# Altium PCB 100861.pcbdoc (part 2 of 2)
Units mm, origin at the board's own origin, x right, y up, seen from the top; angles counter-clockwise.
Board outline 64 x 17.5 mm, 4 copper layers (Top Layer, Ground, Power, Bottom Layer), stack 1.551 mm thick; 99 components, 69 nets, 422 pads, 178 vias.
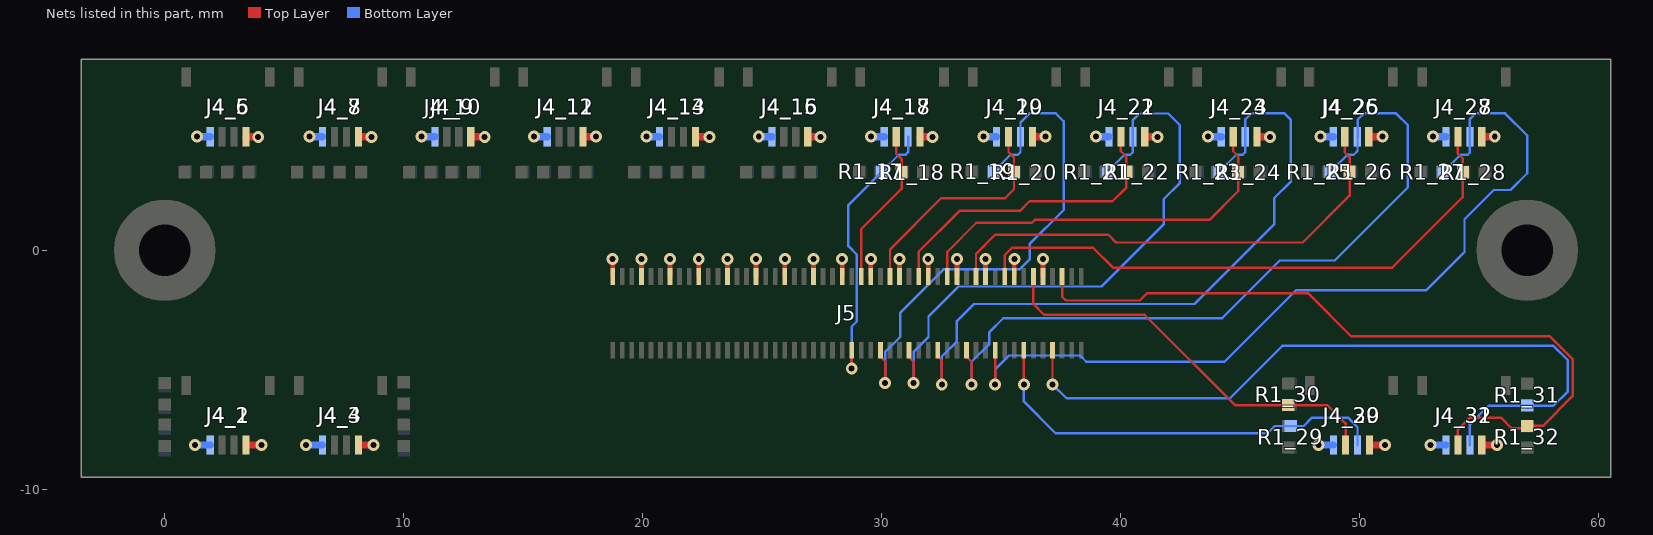
[diagram p4: the nets of this part, all layers, seen from the top]

## Via types
v1: diameter 0.5, hole 0.25, Top Layer to Bottom Layer, tented both sides, 178 vias

## Nets (pads, with @x,y where several pads share a name; then routed paths per layer and width w, separated by ;. In a path a pad name is that pad's centre, name@x,y a point inside that pad or via, vN(x,y) a via of type N, cw(c..) or ccw(c..) an arc to the next point about the centre after c; other vN are vias at no path point) (continued)
SENSOR_B17: J4_17.2 J5.51 R1_17.2 | length 11.9
  Top Layer w0.1: v1(28.74,-4.94) J5.51@28.74,-4.18
  Bottom Layer w0.1: v1(28.74,-4.94) 28.74,-3.185 28.95,-2.975 28.95,-0.175 28.6,0.175 28.6,1.894 R1_17.2@30,3.294 30.706,4 30.993,4 31.1,4.107 J4_17.2@31.1,4.75
SENSOR_B18: J4_18.2 J5.54 R1_18.2 | length 6.6
  Top Layer w0.1: J5.54@29.14,-1.1 29.14,0.885 30.829,2.574 R1_18.2@30.829,3.265 30.829,3.815 30.6,4.043 J4_18.2@30.6,4.75
SENSOR_B19: J4_19.2 J5.57 R1_19.2 | length 22.1
  Top Layer w0.1: J5.57@29.94,-4.18 29.94,-4.449 30.14,-4.649 30.14,-5.543 v1(30.136,-5.547)
  Bottom Layer w0.1: v1(30.136,-5.547) 30.136,-4.256 30.775,-3.618 30.775,-2.6 32.575,-0.8 35.764,-0.8 36.183,-0.382 36.183,0.268 37.607,1.692 37.607,5.394 37.273,5.728 36.183,5.728 35.8,5.345 J4_19.2@35.8,4.75 35.8,4.107 35.693,4 35.386,4 R1_19.2@34.7,3.315
SENSOR_B20: J4_20.2 J5.60 R1_20.2 | length 9.7
  Top Layer w0.1: J5.60@30.34,-1.1 30.34,0.04 32.484,2.184 35.16,2.184 35.529,2.552 R1_20.2@35.529,3.265 35.529,3.89 35.3,4.118 J4_20.2@35.3,4.75
SENSOR_B21: J4_21.2 J5.63 R1_21.2 | length 25.4
  Top Layer w0.1: J5.63@31.14,-4.18 31.14,-4.476 31.328,-4.664 v1(31.328,-5.557)
  Bottom Layer w0.1: v1(31.328,-5.557) 31.328,-4.252 31.95,-3.63 31.95,-2.775 33.213,-1.512 39.189,-1.512 41.786,1.085 41.786,2.136 42.469,2.819 42.469,5.232 41.979,5.722 40.772,5.722 40.5,5.45 J4_21.2@40.5,4.75 40.5,4.107 40.393,4 40.156,4 R1_21.2@39.45,3.294
SENSOR_B22: J4_22.2 J5.66 R1_22.2 | length 13.1
  Top Layer w0.1: J5.66@31.54,-1.1 31.54,-0.06 33.25,1.65 35.775,1.65 36.175,2.05 39.644,2.05 40.229,2.635 R1_22.2@40.229,3.29 40.229,3.915 40,4.143 J4_22.2@40,4.75
SENSOR_B23: J4_23.2 J5.69 R1_23.2 | length 28.9
  Top Layer w0.1: J5.69@32.34,-4.18 32.34,-4.442 32.507,-4.609 v1(32.507,-5.608)
  Bottom Layer w0.1: v1(32.507,-5.608) 32.507,-4.443 33.14,-3.81 33.14,-2.96 33.855,-2.245 43.078,-2.245 46.408,1.085 46.408,2.178 47.112,2.882 47.112,5.456 46.84,5.728 45.45,5.728 45.2,5.478 J4_23.2@45.2,4.75 45.2,4.107 45.093,4 44.828,4 R1_23.2@44.122,3.294
SENSOR_B24: J4_24.2 J5.72 R1_24.2 | length 16.6
  Top Layer w0.1: J5.72@32.74,-1.1 32.74,-0.06 33.95,1.15 36.275,1.15 36.4,1.275 43.707,1.275 44.904,2.471 R1_24.2@44.904,3.265 44.904,3.94 44.7,4.143 J4_24.2@44.7,4.75
SENSOR_B25: J4_25.2 J5.75 R1_25.2 | length 31.8
  Top Layer w0.1: J5.75@33.54,-4.18 33.54,-4.45 33.754,-4.664 v1(33.754,-5.612)
  Bottom Layer w0.1: v1(33.754,-5.612) 33.754,-4.664 34.498,-3.919 34.498,-3.418 35.076,-2.84 44.234,-2.84 46.649,-0.425 48.948,-0.425 52,2.627 52,5.238 51.51,5.728 50.17,5.728 49.902,5.46 49.902,4.753 J4_25.2@49.9,4.75 49.9,4.157 49.743,4 49.478,4 R1_25.2@48.772,3.294
SENSOR_B26: J4_26.2 J5.78 R1_26.2 | length 20.4
  Top Layer w0.1: J5.78@33.94,-1.1 33.94,-0.15 34.74,0.65 39.475,0.65 39.8,0.325 47.605,0.325 49.57,2.29 R1_26.2@49.57,3.294 49.57,3.889 49.366,4.093 J4_26.2@49.366,4.75
SENSOR_B27: J4_27.2 J5.81 R1_27.2 | length 36
  Top Layer w0.1: v1(34.74,-5.608) J5.81@34.74,-4.18
  Bottom Layer w0.1: v1(34.74,-5.608) 34.74,-4.98 35.321,-4.399 38.285,-4.399 38.55,-4.664 44.336,-4.664 47.337,-1.663 52.779,-1.663 54.375,-0.067 54.375,1.3 55.6,2.525 56.3,2.525 57,3.225 57,4.801 56.073,5.728 54.838,5.728 54.6,5.49 J4_27.2@54.6,4.75 54.6,4.086 54.513,4 54.21,4 R1_27.2@53.504,3.294
SENSOR_B28: J4_28.2 J5.84 R1_28.2 | length 24.4
  Top Layer w0.1: J5.84@35.14,-1.1 35.14,-0.2 35.45,0.11 38.84,0.11 39.675,-0.725 51.355,-0.725 54.304,2.224 R1_28.2@54.304,3.269 54.304,3.839 54.1,4.043 J4_28.2@54.1,4.75
SENSOR_B29: J4_29.2 J5.87 R1_29.2 | length 17.8
  Top Layer w0.1: v1(35.94,-5.608) J5.87@35.94,-4.18
  Bottom Layer w0.1: v1(35.94,-5.608) 35.94,-6.325 37.273,-7.658 46.126,-7.658 46.434,-7.35 R1_29.2@47.105,-7.35 47.65,-7.35 48,-7 49.5,-7 49.9,-7.4 J4_29.2@49.9,-8.15
SENSOR_B30: J4_30.2 J5.90 R1_30.2 | length 17.3
  Top Layer w0.1: J5.90@36.34,-1.1 36.34,-2.245 36.795,-2.7 41,-2.7 44.778,-6.478 R1_30.2@47,-6.478 R1_30.2@47.053,-6.478 ; R1_30.2@47,-6.425 R1_30.2@47.053,-6.478 ; J4_30.2@49.4,-8.15 49.4,-7.242 48.636,-6.478 R1_30.2@47.053,-6.478
SENSOR_B31: J4_31.2 J5.93 R1_31.2 | length 31.3
  Top Layer w0.1: v1(37.14,-5.608) J5.93@37.14,-4.18
  Bottom Layer w0.1: v1(37.14,-5.608) 37.724,-6.192 44.558,-6.192 46.75,-4 58.1,-4 58.7,-4.6 58.7,-5.9 58.1,-6.5 R1_31.2@57,-6.5 55.381,-6.5 54.6,-7.282 J4_31.2@54.6,-8.15 ; R1_31.2@57,-6.598 R1_31.2@57.039,-6.598
SENSOR_B32: J4_32.2 J5.96 R1_32.2 | length 31.5
  Top Layer w0.1: J5.96@37.54,-1.1 37.54,-1.94 37.7,-2.1 40.79,-2.1 41.1,-1.79 47.828,-1.79 49.638,-3.6 57.952,-3.6 58.9,-4.548 58.9,-6.1 57.653,-7.347 R1_32.2@57,-7.347 56.898,-7.449 56.35,-7.449 55.901,-7 54.6,-7 54.1,-7.5 J4_32.2@54.1,-8.15
SENSOR_VCC1: J4_1.4 J4_2.4 J4_3.4 J4_4.4 J4_5.4 J4_6.4 J4_7.4 J4_8.4 J5.2 J5.8 J5.14 J5.20 | length 7.7
  Top Layer w0.2: J5.2@18.74,-1.1 v1(18.74,-0.368) ; J5.8@19.94,-1.1 v1(19.94,-0.368) ; J5.14@21.14,-1.1 v1(21.14,-0.368) ; J5.20@22.34,-1.1 v1(22.34,-0.368)
  Top Layer w0.3: J4_2.4@3.4,-8.15 v1(4.041,-8.15) ; J4_6.4@3.4,4.75 v1(3.91,4.75) ; J4_4.4@8.1,-8.15 v1(8.741,-8.15) ; J4_8.4@8.1,4.75 v1(8.64,4.75)
  Bottom Layer w0.3: v1(1.259,-8.15) J4_1.4@1.9,-8.15 ; v1(1.35,4.76) 1.36,4.75 J4_5.4@1.9,4.75 ; v1(5.9,-8.15) J4_3.4@6.6,-8.15 ; v1@6.064,4.75 J4_7.4@6.6,4.75
  other v1: 6.05,4.76
SENSOR_VCC2: J4_9.4 J4_10.4 J4_11.4 J4_12.4 J4_13.4 J4_14.4 J4_15.4 J4_16.4 J5.26 J5.32 J5.38 J5.44 | length 7.3
  Top Layer w0.2: J5.26@23.54,-1.1 v1(23.54,-0.368) ; J5.32@24.74,-1.1 v1(24.74,-0.368) ; J5.38@25.94,-1.1 v1(25.94,-0.368) ; J5.44@27.14,-1.1 v1(27.14,-0.368)
  Top Layer w0.3: J4_10.4@12.8,4.75 v1(13.386,4.75) ; J4_12.4@17.5,4.75 18.03,4.75 v1(18.04,4.76) ; J4_14.4@22.2,4.75 v1(22.786,4.75) ; J4_16.4@26.897,4.75 v1(27.44,4.75)
  Bottom Layer w0.3: v1@10.764,4.75 J4_9.4@11.3,4.75 ; v1@15.464,4.75 J4_11.4@16,4.75 ; v1@20.164,4.75 J4_13.4@20.7,4.75 ; v1@24.864,4.75 J4_15.4@25.4,4.75
  other v1: 10.75,4.76 15.45,4.76 20.15,4.76 24.85,4.76
SENSOR_VCC3: J4_17.4 J4_18.4 J4_19.4 J4_20.4 J4_21.4 J4_22.4 J4_23.4 J4_24.4 J5.50 J5.56 J5.62 J5.68 | length 7.2
  Top Layer w0.2: J5.50@28.34,-1.1 v1(28.34,-0.368) ; J5.56@29.54,-1.1 v1(29.54,-0.368) ; J5.62@30.74,-1.1 v1(30.74,-0.368) ; J5.68@31.94,-1.1 v1(31.94,-0.368)
  Top Layer w0.3: J4_18.4@31.6,4.75 v1(32.122,4.75) ; J4_20.4@36.3,4.75 36.83,4.75 v1(36.84,4.76) ; J4_22.4@41,4.75 v1(41.54,4.75) ; J4_24.4@45.7,4.75 v1(46.24,4.75)
  Bottom Layer w0.3: v1@29.564,4.75 J4_17.4@30.1,4.75 ; v1@34.264,4.75 J4_19.4@34.8,4.75 ; v1@38.964,4.75 J4_21.4@39.5,4.75 ; v1@43.664,4.75 J4_23.4@44.2,4.75
  other v1: 29.55,4.76 34.25,4.76 38.95,4.76 43.65,4.76
SENSOR_VCC4: J4_25.4 J4_26.4 J4_27.4 J4_28.4 J4_29.4 J4_30.4 J4_31.4 J4_32.4 J5.74 J5.80 J5.86 J5.92 | length 7.7
  Top Layer w0.2: J5.74@33.14,-1.1 v1(33.14,-0.368) ; J5.80@34.34,-1.1 v1(34.34,-0.368) ; J5.86@35.54,-1.1 v1(35.54,-0.368) ; J5.92@36.74,-1.1 v1(36.74,-0.368)
  Top Layer w0.3: J4_26.4@50.366,4.75 50.93,4.75 v1(50.94,4.76) ; J4_30.4@50.4,-8.15 v1(51.041,-8.15) ; J4_32.4@55.1,-8.15 v1(55.741,-8.15) ; J4_28.4@55.1,4.75 55.63,4.75 v1(55.64,4.76)
  Bottom Layer w0.1: v1(53.05,4.76) 53.054,4.76 v1@53.064,4.75
  Bottom Layer w0.3: v1(48.259,-8.15) J4_29.4@48.9,-8.15 ; v1@48.364,4.75 J4_25.4@48.9,4.75 ; v1(52.959,-8.15) J4_31.4@53.6,-8.15 ; v1@53.064,4.75 J4_27.4@53.6,4.75
  other v1: 48.35,4.76

## Polygon pours and split planes (outlines as drawn)
no net on FAB_DWG (solid): -233.325,-25.12 ccw(c-233.825,-25.12) -233.825,-24.62 ccw(c-233.825,-25.12) -234.325,-25.12 ccw(c-233.825,-25.12) -233.825,-25.62 ccw(c-233.825,-25.12) -233.325,-25.12
no net on FAB_DWG (solid): -235.325,-25.12 ccw(c-235.825,-25.12) -235.825,-24.62 ccw(c-235.825,-25.12) -236.325,-25.12 ccw(c-235.825,-25.12) -235.825,-25.62 ccw(c-235.825,-25.12) -235.325,-25.12
no net on FAB_DWG (solid): -233.325,-75.12 ccw(c-233.825,-75.12) -233.825,-74.62 ccw(c-233.825,-75.12) -234.325,-75.12 ccw(c-233.825,-75.12) -233.825,-75.62 ccw(c-233.825,-75.12) -233.325,-75.12
no net on FAB_DWG (solid): -235.325,-75.12 ccw(c-235.825,-75.12) -235.825,-74.62 ccw(c-235.825,-75.12) -236.325,-75.12 ccw(c-235.825,-75.12) -235.825,-75.62 ccw(c-235.825,-75.12) -235.325,-75.12
no net on FAB_DWG (solid): -239.325,-25.12 ccw(c-239.825,-25.12) -239.825,-24.62 ccw(c-239.825,-25.12) -240.325,-25.12 ccw(c-239.825,-25.12) -239.825,-25.62 ccw(c-239.825,-25.12) -239.325,-25.12
no net on FAB_DWG (solid): -241.325,-25.12 ccw(c-241.825,-25.12) -241.825,-24.62 ccw(c-241.825,-25.12) -242.325,-25.12 ccw(c-241.825,-25.12) -241.825,-25.62 ccw(c-241.825,-25.12) -241.325,-25.12
no net on FAB_DWG (solid): -243.325,-25.12 ccw(c-243.825,-25.12) -243.825,-24.62 ccw(c-243.825,-25.12) -244.325,-25.12 ccw(c-243.825,-25.12) -243.825,-25.62 ccw(c-243.825,-25.12) -243.325,-25.12
no net on FAB_DWG (solid): -237.325,-25.12 ccw(c-237.825,-25.12) -237.825,-24.62 ccw(c-237.825,-25.12) -238.325,-25.12 ccw(c-237.825,-25.12) -237.825,-25.62 ccw(c-237.825,-25.12) -237.325,-25.12
no net on FAB_DWG (solid): -239.325,-75.12 ccw(c-239.825,-75.12) -239.825,-74.62 ccw(c-239.825,-75.12) -240.325,-75.12 ccw(c-239.825,-75.12) -239.825,-75.62 ccw(c-239.825,-75.12) -239.325,-75.12
no net on FAB_DWG (solid): -241.325,-75.12 ccw(c-241.825,-75.12) -241.825,-74.62 ccw(c-241.825,-75.12) -242.325,-75.12 ccw(c-241.825,-75.12) -241.825,-75.62 ccw(c-241.825,-75.12) -241.325,-75.12
no net on FAB_DWG (solid): -243.325,-75.12 ccw(c-243.825,-75.12) -243.825,-74.62 ccw(c-243.825,-75.12) -244.325,-75.12 ccw(c-243.825,-75.12) -243.825,-75.62 ccw(c-243.825,-75.12) -243.325,-75.12
no net on FAB_DWG (solid): -237.325,-75.12 ccw(c-237.825,-75.12) -237.825,-74.62 ccw(c-237.825,-75.12) -238.325,-75.12 ccw(c-237.825,-75.12) -237.825,-75.62 ccw(c-237.825,-75.12) -237.325,-75.12
no net on FAB_DWG (solid): -247.325,-25.12 ccw(c-247.825,-25.12) -247.825,-24.62 ccw(c-247.825,-25.12) -248.325,-25.12 ccw(c-247.825,-25.12) -247.825,-25.62 ccw(c-247.825,-25.12) -247.325,-25.12
no net on FAB_DWG (solid): -251.325,-25.12 ccw(c-251.825,-25.12) -251.825,-24.62 ccw(c-251.825,-25.12) -252.325,-25.12 ccw(c-251.825,-25.12) -251.825,-25.62 ccw(c-251.825,-25.12) -251.325,-25.12
no net on FAB_DWG (solid): -249.325,-25.12 ccw(c-249.825,-25.12) -249.825,-24.62 ccw(c-249.825,-25.12) -250.325,-25.12 ccw(c-249.825,-25.12) -249.825,-25.62 ccw(c-249.825,-25.12) -249.325,-25.12
no net on FAB_DWG (solid): -245.325,-25.12 ccw(c-245.825,-25.12) -245.825,-24.62 ccw(c-245.825,-25.12) -246.325,-25.12 ccw(c-245.825,-25.12) -245.825,-25.62 ccw(c-245.825,-25.12) -245.325,-25.12
no net on FAB_DWG (solid): -247.325,-75.12 ccw(c-247.825,-75.12) -247.825,-74.62 ccw(c-247.825,-75.12) -248.325,-75.12 ccw(c-247.825,-75.12) -247.825,-75.62 ccw(c-247.825,-75.12) -247.325,-75.12
no net on FAB_DWG (solid): -251.325,-75.12 ccw(c-251.825,-75.12) -251.825,-74.62 ccw(c-251.825,-75.12) -252.325,-75.12 ccw(c-251.825,-75.12) -251.825,-75.62 ccw(c-251.825,-75.12) -251.325,-75.12
no net on FAB_DWG (solid): -249.325,-75.12 ccw(c-249.825,-75.12) -249.825,-74.62 ccw(c-249.825,-75.12) -250.325,-75.12 ccw(c-249.825,-75.12) -249.825,-75.62 ccw(c-249.825,-75.12) -249.325,-75.12
no net on FAB_DWG (solid): -245.325,-75.12 ccw(c-245.825,-75.12) -245.825,-74.62 ccw(c-245.825,-75.12) -246.325,-75.12 ccw(c-245.825,-75.12) -245.825,-75.62 ccw(c-245.825,-75.12) -245.325,-75.12
no net on FAB_DWG (solid): -255.325,-25.12 ccw(c-255.825,-25.12) -255.825,-24.62 ccw(c-255.825,-25.12) -256.325,-25.12 ccw(c-255.825,-25.12) -255.825,-25.62 ccw(c-255.825,-25.12) -255.325,-25.12
no net on FAB_DWG (solid): -259.325,-25.12 ccw(c-259.825,-25.12) -259.825,-24.62 ccw(c-259.825,-25.12) -260.325,-25.12 ccw(c-259.825,-25.12) -259.825,-25.62 ccw(c-259.825,-25.12) -259.325,-25.12
no net on FAB_DWG (solid): -257.325,-25.12 ccw(c-257.825,-25.12) -257.825,-24.62 ccw(c-257.825,-25.12) -258.325,-25.12 ccw(c-257.825,-25.12) -257.825,-25.62 ccw(c-257.825,-25.12) -257.325,-25.12
no net on FAB_DWG (solid): -253.325,-25.12 ccw(c-253.825,-25.12) -253.825,-24.62 ccw(c-253.825,-25.12) -254.325,-25.12 ccw(c-253.825,-25.12) -253.825,-25.62 ccw(c-253.825,-25.12) -253.325,-25.12
no net on FAB_DWG (solid): -255.325,-75.12 ccw(c-255.825,-75.12) -255.825,-74.62 ccw(c-255.825,-75.12) -256.325,-75.12 ccw(c-255.825,-75.12) -255.825,-75.62 ccw(c-255.825,-75.12) -255.325,-75.12
no net on FAB_DWG (solid): -259.325,-75.12 ccw(c-259.825,-75.12) -259.825,-74.62 ccw(c-259.825,-75.12) -260.325,-75.12 ccw(c-259.825,-75.12) -259.825,-75.62 ccw(c-259.825,-75.12) -259.325,-75.12
no net on FAB_DWG (solid): -257.325,-75.12 ccw(c-257.825,-75.12) -257.825,-74.62 ccw(c-257.825,-75.12) -258.325,-75.12 ccw(c-257.825,-75.12) -257.825,-75.62 ccw(c-257.825,-75.12) -257.325,-75.12
no net on FAB_DWG (solid): -253.325,-75.12 ccw(c-253.825,-75.12) -253.825,-74.62 ccw(c-253.825,-75.12) -254.325,-75.12 ccw(c-253.825,-75.12) -253.825,-75.62 ccw(c-253.825,-75.12) -253.325,-75.12
no net on FAB_DWG (solid): -261.325,-25.12 ccw(c-261.825,-25.12) -261.825,-24.62 ccw(c-261.825,-25.12) -262.325,-25.12 ccw(c-261.825,-25.12) -261.825,-25.62 ccw(c-261.825,-25.12) -261.325,-25.12
no net on FAB_DWG (solid): -263.825,-33.12 -263.325,-31.62 -232.325,-31.62 -231.825,-33.12 -263.825,-33.12
no net on FAB_DWG (solid): -263.925,-46.62 -263.425,-45.12 -232.225,-45.12 -231.725,-46.62 -263.925,-46.62
no net on FAB_DWG (solid): -231.725,-53.62 -232.225,-55.12 -263.425,-55.12 -263.925,-53.62 -231.725,-53.62
no net on FAB_DWG (solid): -231.825,-67.12 -232.325,-68.62 -263.325,-68.62 -263.825,-67.12 -231.825,-67.12
no net on FAB_DWG (solid): -261.325,-75.12 ccw(c-261.825,-75.12) -261.825,-74.62 ccw(c-261.825,-75.12) -262.325,-75.12 ccw(c-261.825,-75.12) -261.825,-75.62 ccw(c-261.825,-75.12) -261.325,-75.12
no net on FAB_DWG (solid): -318.825,-24.62 -317.825,-28.62 -318.825,-28.12 -319.825,-28.62 -318.825,-24.62
no net on FAB_DWG (solid): -318.825,-75.62 -319.825,-71.62 -318.825,-72.12 -317.825,-71.62 -318.825,-75.62
no net on FAB_DWG (solid): 1029 vertices, not listed, extent 280.89,-133.333 421.936,-119.759
no net on FAB_DWG (solid): 89 vertices, not listed, extent 321.11,-123.525 327.529,-119.761
no net on FAB_DWG (solid): 74 vertices, not listed, extent 332.78,-126.496 340.172,-119.761
no net on FAB_DWG (solid): 83 vertices, not listed, extent 346.562,-125.262 351.467,-120.673
no net on FAB_DWG (solid): 82 vertices, not listed, extent 358.174,-123.906 364.519,-120.678
no net on ASY_DWG (solid): 1029 vertices, not listed, extent 280.89,-133.333 421.936,-119.759
no net on ASY_DWG (solid): 89 vertices, not listed, extent 321.11,-123.525 327.529,-119.761
no net on ASY_DWG (solid): 74 vertices, not listed, extent 332.78,-126.496 340.172,-119.761
no net on ASY_DWG (solid): 83 vertices, not listed, extent 346.562,-125.262 351.467,-120.673
no net on ASY_DWG (solid): 82 vertices, not listed, extent 358.174,-123.906 364.519,-120.678
no net on ASY_DWG_R (solid): 1029 vertices, not listed, extent -349.064,-133.333 -208.018,-119.759
no net on ASY_DWG_R (solid): 89 vertices, not listed, extent -254.657,-123.525 -248.237,-119.761
no net on ASY_DWG_R (solid): 74 vertices, not listed, extent -267.3,-126.496 -259.907,-119.761
no net on ASY_DWG_R (solid): 83 vertices, not listed, extent -278.594,-125.262 -273.689,-120.673
no net on ASY_DWG_R (solid): 82 vertices, not listed, extent -291.647,-123.906 -285.302,-120.678
no net on TITLEBLOCK (solid): 331 vertices, not listed, extent -27.089,-106.333 31.616,-99.713
no net on TITLEBLOCK (solid): -5.152,-99.933 -2.614,-102.251 -2.614,-99.933 -5.152,-99.933
no net on TITLEBLOCK (solid): -10.339,-99.933 -9.216,-101.142 -8.137,-99.933 -10.339,-99.933
no net on TITLEBLOCK (solid): 0.146,-101.833 1.136,-100.033 2.036,-101.833 0.146,-101.833
no net on TITLEBLOCK (solid): 26 vertices, not listed, extent 4.986,-101.233 7.686,-99.933
SENSOR_VCC3 on Power "SENSOR_VCC3_L03_P224" (solid, pour order 224): 27.593,-9.948 27.593,10.352 63.548,10.352 63.548,-9.948 50.759,-9.948
SENSOR_VCC2 on Power "SENSOR_VCC2_L03_P222" (solid, pour order 222): 27.805,-10.963 27.805,9.337 -5.195,9.337 -5.195,-10.963 7.594,-10.963
SENSOR_VCC4 on Power "SENSOR_VCC4_L03_P220" (solid, pour order 220): 32.74,-2.04 32.74,1.865 47.039,1.865 47.039,8.96 61.44,8.96 61.44,-9.5 47.343,-9.5 47.343,-3.851 45.532,-2.04
SENSOR_VCC1 on Power "SENSOR_VCC1_L03_P216" (solid, pour order 216): 22.74,-2.04 22.75,-2.03 22.75,1.865 9.31,1.865 9.31,8.96 -3.5,8.96 -3.5,-9.5 10,-9.5 10,-3.557 11.517,-2.04
GND on Ground "GND_L02_P226" (solid, pour order 226): -7.66,10.76 -7.86,10.56 -7.86,-14 62,-14 62,10.96 -6.06,11.06 -6.16,10.96

## Other copper
Top Layer:
  text ".Layer_Name" at 0.372,-125.304 h3.5
Ground:
  text ".Layer_Name" at 3.44,-125.54 h3.5
Power:
  text ".Layer_Name" at 5.24,-125.54 h3.5
Bottom Layer:
  text "601-'.Board_Number'-R'.PCB_Revision'" at 33.507,-8.125 h1
  text ".Layer_Name" at -5.043,-124.971 h3.5

## Silkscreen, mask and mechanical layers (free items; w line width, h text height)
Top Overlay:
  region: 50.32,-0.1 54.32,-0.1 54.32,-4.1 50.32,-4.1
  lines w0.15: 15.039,-8.74 15.039,-2.24 ; 15.039,-2.115 cw(c17.039,-2.115) 17.039,-0.115 39.625,-0.115 cw(c39.625,-1.115) 40.332,-0.408 41.747,-1.822 cw(c41.039,-2.529) 42.039,-2.529 ; 42.04,-8.74 42.04,-2.54
  text "#21" at 38.9,1.2 h1.25
  text "#5" at 2.4,1.1 h1.25
  text "#7" at 6.1,1.1 h1.25
  text "#9" at 10.8,1.1 h1.25
  text "#11" at 15.214,1.1 h1.25
  text "#13" at 19.8,1.1 h1.25
  text "#15" at 24.5,1.1 h1.25
  text "#17" at 29.3,1.1 h1.25
  text "#19" at 33.55,1.1 h1.25
  text "#23" at 43.576,1.1 h1.25
  text "#25" at 47.6,1.1 h1.25
  text "#27" at 51.8,1.1 h1.25
  text "'.Board_Name'" at 2.8,-0.4 h1
  text "REV" at 47.353,-2.04 h0.9
  text "601-'.Board_Number'" at 4.1,-2.3 h1
  text "#29" at 46.1,-4.7 h1.25
  text "#31" at 55.4,-4.7 h1.25
  text "#1" at 1.9,-5 h1.25
  text "#3" at 6.486,-5 h1.25
  text ".Layer_Name" at -1.2,-125 h3.5
Bottom Overlay:
  lines w0.1: 20.24,-6.5 37.24,-6.5 37.24,-0.5 20.24,-0.5 20.24,-6.5
  text "#4" at 4.7,1.1 h1.25
  text "#6" at 8.2,1.1 h1.25
  text "#8" at 13,1.1 h1.25
  text "#10" at 17.9,1.1 h1.25
  text "#12" at 22.6,1.1 h1.25
  text "#14" at 27.3,1.1 h1.25
  text "#16" at 32,1.1 h1.25
  text "#18" at 36.85,1.1 h1.25
  text "#20" at 41.55,1.1 h1.25
  text "#22" at 46.486,1.1 h1.25
  text "#26" at 54.7,1.1 h1.25
  text "#24" at 50.6,1 h1.25
  text "#0" at 3.578,-4.6 h1.25
  text "#2" at 8.4,-4.6 h1.25
  text "#28" at 51,-4.6 h1.25
  text "#30" at 56.2,-4.6 h1.25
  text ".Layer_Name" at -4.96,-125.64 h3.5
Top Paste:
  text ".Layer_Name" at -0.703,-124.971 h3.5
Bottom Paste:
  text ".Layer_Name" at -5.193,-125.554 h3.5
Top Solder:
  text ".Layer_Name" at -1.377,-124.971 h3.5
Bottom Solder:
  text ".Layer_Name" at -5.868,-125.554 h3.5
Drill Guide:
  text ".Layer_Name" at -0.153,-125.638 h3.5
Outline:
  lines w0.013: -3.5,-9.5 -3.5,8 60.5,8 60.5,-9.5 4,-9.5 -3.5,-9.5
FAB_DWG:
  drawing of 241 lines, arcs and shapes, not listed
  text "1" at 364.772,324.655 h7.62
  text "6" at -186.56,324.477 h7.62
  text "5" at -75.968,324.401 h7.62
  text "7" at -296.491,324.35 h7.62
  text "4" at 33.633,324.249 h7.62
  text "3" at 144.402,324.249 h7.62
  text "2" at 254.435,324.249 h7.62
  text "REVISIONS" at 318.792,315.667 h2.54
  text "NOTES: UNLESS OTHERWISE SPECIFIED" at -337.668,309.205 h2.03
  text "REV" at 236.5,308.667 h2.03
  text "DESCRIPTION" at 291.004,308.667 h2.03
  text "DATE" at 382.688,308.667 h2.03
  text "APRVD" at 407.876,308.667 h2.03
  text "1   DIMENSIONS AND VALUES ARE METRIC." at -337.668,301.205 h2.03
  text "01" at 236.904,300.667 h2.54
  text "INITIAL RELEASE" at 247.936,300.667 h2.54
  text "08/11/2016" at 376.776,300.667 h2.54
  text "2   FABRICATION OF PRINTED CIRCUIT BOARD SHALL BE IN ACCORDANCE WITH" at -337.668,295.205 h2.03
  text "02" at 236.804,293.867 h2.54
  text "ALPHA 2 RELEASE" at 247.836,293.867 h2.54
  text "09/19/2016" at 376.676,293.867 h2.54
  text "IPC-6011 AND IPC-6012, CLASS 2, AND THE DESIGN INTENT OF IPC-2221 AND" at -337.668,291.205 h2.03
  text "IPC-2222,CLASS 2, AND SHALL MEET THE ACCEPTABILITY REQUIREMENTS OF" at -337.668,287.205 h2.03
  text "IPC-A-600. PRODUCE PCB USING GERBER OR ODB++ FILES PROVIDED." at -337.668,283.205 h2.03
  text "3   FABRICATION VENDOR MUST BE UL APPROVED AND BOARD SHALL BE MARKED WITH" at -337.668,277.205 h2.03
  text "A UL REGISTERED LOGO. MATERIAL MUST MEET UL 94V-0 FLAMMABILITY RATING." at -337.668,273.205 h2.03
  text "4   MATERIAL REQUIREMENTS: MANUFACTURER SHALL SELECT MATERIALS TO ACHIEVE A" at -337.668,267.205 h2.03
  text "BALANCED CONSTRUCTION WITH THE OPTION OF MODIFYING DIELECTRIC THICKNESS" at -337.668,263.205 h2.03
  text "TO MEET THE REQUIREMENTS SPECIFIED HEREIN." at -337.668,259.205 h2.03
  text "D" at 426.621,254.983 h7.62
  text "D" at -358.061,254.831 h7.62
  text "5  BASE MATERIALS: GLASS EPOXY FR4 OR EQUIVALENT PER IPC-4101 MEETING RoHS" at -337.668,253.205 h2.03
  text "REQUIREMENTS FOR PCB FABRICATION AND ASSEMBLY, NOT LESS THAN TG150," at -337.668,249.205 h2.03
  text "A  SEE LAYER DETAIL FOR LAYER STACK UP, ESTIMATED DIELECTRIC THICKNESS," at -337.668,245.205 h2.03
  text "AND COPPER WEIGHT." at -337.668,241.205 h2.03
  text "B  MANUFACTURER SHALL SUBMIT A PROPOSED STACK UP FOR SYNAPSE APPROVAL" at -337.668,237.205 h2.03
  text "IF MODIFICATION IS REQUIRED." at -337.668,233.205 h2.03
  text "C  NO MATERIAL SUBSTITUTIONS WILL BE ALLOWED WITHOUT SYNAPSE APPROVAL." at -337.668,229.205 h2.03
  text "6   PROCESSING ALLOWANCE:" at -337.668,223.205 h2.03
  text "A  LAYER REGISTRATION FROM PRIMARY SIDE TO SECONDARY SIDE SHALL NOT" at -337.668,219.205 h2.03
  text "EXCEED 0.13mm TOTAL." at -337.668,215.205 h2.03
  text "B  MAXIMUM BOW AND TWIST SHALL BE .75% PER IPC-TM-650." at -337.668,211.205 h2.03
  text "7   VIAS" at -337.668,205.205 h2.03
  text "A  VIAS WITH A FINISHED HOLE SIZE OF 0.25mm OR SMALLER DO NOT REQUIRE" at -337.668,201.205 h2.03
  text "A MINIMUM HOLE SIZE AND MAY BE PLATED SHUT OR FILLED WITH SOLDER" at -337.668,197.205 h2.03
  text "MASK. MINIMUM SOLDER PLATING MUST BE MAINTAINED." at -337.668,193.205 h2.03
  text "B  ALL LASER VIA IN PADS TO BE COPLANAR IF PRESENT IN DESIGN." at -337.668,189.205 h2.03
  text "8   CONDUCTORS:  COPPER FOIL SHALL BE IN ACCORDANCE WITH IPC-4562/0." at -337.668,183.205 h2.03
  text "A  FINISH. COPPER PLATE THICKNESS ON SURFACE COPPER AND PLATED" at -337.668,179.205 h2.03
  text "THROUGH HOLES TO BE 0.025mm MINIMUM." at -337.668,175.205 h2.03
  text "B  MINIMUM FINISH CONDUCTOR WIDTH IS 0.076mm" at -337.668,171.205 h2.03
  text "C  MINIMUM FINISHED CONDUCTOR SPACING (AIR GAP) INCLUDING PADS, VIAS," at -337.668,167.205 h2.03
  text "SHAPES, ETC. IS 0.076mm." at -337.668,163.205 h2.03
  text "9   FINAL FINISH SHALL BE ELECTROLESS NICKEL / IMMERSION GOLD (ENIG)." at -337.668,157.205 h2.03
  text "FINISH THICKNESS SHALL BE 3 TO 6 um [118 TO 236 MICROINCHES] OF NICKEL" at -337.668,153.205 h2.03
  text "AND 0.04 TO 0.125um [1.5 TO 5 MICROINCHES] OF GOLD." at -337.668,149.205 h2.03
  text "FINISH SHALL BE RoHS COMPLIANT AND MEET REQUIREMENTS OF IPC-4552." at -337.668,145.205 h2.03
  text "10  FILLETING IS NOT PERMITTED WITHOUT PRIOR SYNAPSE APPROVAL." at -337.668,139.205 h2.03
  text "11  SOLDER MASK AND COATING:  APPLY SOLDER MASK TO PRIMARY AND SECONDARY" at -337.668,133.205 h2.03
  text "C" at 426.621,129.532 h7.62
  text "C" at -358.188,129.329 h7.62
  text "SIDES OF PRINTED WIRING BOARD USING SUPPLIED GERBER FILES IN ACCORDANCE" at -337.668,129.205 h2.03
  text "WITH IPC-SM-840, THICKNESS BETWEEN 0.02 - 0.04mm, COLOR GREEN LIQUID" at -337.668,125.205 h2.03
  text "PHOTO-IMAGEABLE, CLASS 2." at -337.668,121.205 h2.03
  text "12  OVERALL BOARD THICKNESS SHALL BE MEASURED OVER FINAL FINISH INCLUDING" at -337.668,115.205 h2.03
  text "SOLDER MASK." at -337.668,111.205 h2.03
  text "13  SILKSCREEN:  APPLY SILKSCREEN (LEGEND) TO PRIMARY AND SECONDARY SIDES" at -337.668,105.205 h2.03
  text "OF PRINTED CIRCUIT BOARD. USE PERMANENT INK, NON-NUTRIENT, NON-" at -337.668,101.205 h2.03
  text "CONDUCTIVE POLYMER, COLOR WHITE, PER IPC-4781, TYPE 2. RELIEVE LEGEND" at -337.668,97.205 h2.03
  text "FROM ALL EXPOSED LANDS AND HOLES AS REQUIRED." at -337.668,93.205 h2.03
  text "14  ANY ALTERATIONS TO THE PROVIDED GERBER ARTWORK FILES MUST BE SUBMITTED" at -337.668,87.205 h2.03
  text "TO SYNAPSE FOR APPROVAL." at -337.668,83.205 h2.03
  text "15  MARK MANUFACTURER NAME, INITIALS, OR LOGO, LOT NUMBER, DATE CODE," at -337.668,77.705 h2.03
  text "UL RECOGNITION MARK AND FLAME RATING IN ETCH OR SILKSCREEN." at -337.668,73.705 h2.03
  text "16  PANELIZATION: COORDINATE WITH SYNAPSE OR THE SYNAPSE SPECIFIED" at -337.668,67.955 h2.03
  text "ASSEMBLY VENDOR FOR PANEL SIZE AND CONFIGURATION. IF BOARDS ARE" at -337.668,63.955 h2.03
  text "NOT TO BE COMPLETELY ROUTED OUT, TRIM PANELIZATION TABS TO LESS" at -337.668,59.955 h2.03
  text "THAN 0.1mm UPON DE-PANELIZATION. AVOID PANELIZATION TABS IN AREAS" at -337.668,55.955 h2.03
  text "INDICATED ON THIS DRAWING." at -337.668,51.955 h2.03
  text "17  BOARD MUST BE ELECTRICALLY TESTED USING SUPPLIED IPC-356 NETLIST." at -337.168,46.955 h2.03
  text "B" at -357.959,3.929 h7.62
  text "B" at 429.698,1.632 h7.62
  text "PRIMARY SIDE" at -257.569,-16.12 h2.03
  text "SILKSCREEN" at -228.325,-21.12 h2.03
  text "SOLDERMASK" at -228.325,-26.62 h2.03
  text "1 OZ CU" at -281.96,-33.54 h2.03
  text "LAYER 1 (SIGNAL)" at -228.325,-33.621 h2.03
  text "DIELECTRIC" at -283.565,-39.12 h2.03
  text "1.5 +/-0.15" at -328.569,-45.62 h2.03
  text "1/2 OZ CU" at -282.06,-46.74 h2.03
  text "LAYER 2 (GROUND)" at -228.325,-47.12 h2.03
  text "FINISHED" at -325.321,-50.62 h2.03
  text "DIELECTRIC" at -283.565,-51.12 h2.03
  text "THICKNESS" at -326.633,-55.62 h2.03
  text "LAYER 3 (POWER)" at -228.325,-55.62 h2.03
  text "1/2 OZ CU" at -282.06,-55.74 h2.03
  text "DIELECTRIC" at -283.565,-63.62 h2.03
  text "1 OZ CU" at -281.96,-68.84 h2.03
  text "LAYER 4 (SIGNAL)" at -228.325,-69.121 h2.03
  text "SOLDERMASK" at -228.325,-76.12 h2.03
  text "SILKSCREEN" at -228.325,-82.121 h2.03
  text "DIMENSIONS ARE FOR REFERENCE ONLY," at 3.536,-84.363 h2.29
  text "SECONDARY SIDE" at -259.193,-86.62 h2.03
  text "USE BOARD OUTLINE FOR DIMENSIONAL DATA." at -2.524,-88.953 h2.29
  text "LAYER DETAIL" at -272.209,-99.616 h5.08
  text "SCALE:NONE" at -257.445,-106.62 h2.03
  text "CAP CONSTRUCTION SHOWN (PREFERRED)" at -275.333,-112.815 h2.03
  text "CORE CONSTRUCTION ACCEPTABLE" at -270.461,-117.62 h2.03
  text "A" at 426.494,-121.826 h7.62
  text "A" at -358.213,-121.953 h7.62
  text "APPROVALS" at 218.628,-125.333 h2.03
  text "DATE" at 261.688,-125.333 h2.03
  text "UNLESS OTHERWISE" at 162.68,-127.333 h2.54
  text "DESIGNER" at 201.936,-131.333 h2.03
  text "SPECIFIED" at 169.792,-132.333 h2.54
  text "DIMENSIONS ARE" at 164.712,-137.333 h2.54
  text "F. PRICE" at 205.936,-137.333 h2.54
  text "09/19/2016" at 255.776,-137.333 h2.54
  text "1511 Sixth Ave. Suite 300, Seattle, WA 98101 206.381.0898" at 293.024,-138.333 h2.54
  text "IN MILLIMETERS" at 164.712,-142.333 h2.54
  text "ENGINEER" at 201.936,-144.333 h2.03
  text "PRINTED CIRCUIT BOARD" at 319.432,-146.833 h3.81
  text "PROPRIETARY" at 114.172,-147.333 h3.81
  text "D. BRUEY /  M. CIUFFO" at 205.936,-150.333 h2.54
  text "TOLERANCES:" at 168.76,-152.333 h2.54
  text "AND" at 126.364,-153.333 h3.81
  text ".Board_Name" at 328.155,-155.012 h5.08
  text "MECH ENG" at 201.936,-157.333 h2.03
  text ".XX" at 167.44,-159.333 h2.29
  text "0.25" at 180.936,-159.333 h2.29
  text "CONFIDENTIAL" at 112.648,-159.833 h3.81
  text "SIZE" at 285.088,-161.333 h1.78
  text "DWG NO" at 295.936,-161.333 h1.78
  text "REV" at 403.8,-161.333 h1.78
  text "N/A" at 205.936,-163.333 h2.54
  text "THE INFORMATION CONTAINED IN" at 114.662,-164.083 h1.52
  text ".XXX" at 165.608,-166.333 h2.29
  text "0.127" at 180.936,-166.333 h2.29
  text "THIS DRAWING IS PROPRIETARY AND" at 112.838,-166.833 h1.52
  text "RESTRICTED. ANY REPRODUCTION" at 114.662,-169.583 h1.52
  text "601-" at 312.991,-171.034 h7.62
  text ".Board_Number" at 341.391,-171.134 h7.62
  text "D" at 284.888,-171.333 h7.62
  text ".PCB_Revision" at 399.332,-171.841 h7.62
  text "IN PART OR WHOLE WITHOUT THE" at 114.662,-172.333 h1.52
  text "ANGLES" at 167.944,-173.333 h2.29
  text "5" at 186.936,-173.333 h2.29
  text "EXPRESS WRITTEN PERMISSION" at 115.628,-175.083 h1.52
  text "OF THE OWNER IS PROHIBITED" at 115.628,-177.833 h1.52
  text "SCALE:NONE" at 285.816,-178.333 h1.78
  text "SHEET 1 OF 1" at 397.392,-178.333 h1.78
  text "1" at 364.976,-190.381 h7.62
  text "6" at -186.484,-190.533 h7.62
  text "5" at -76.045,-190.533 h7.62
  text "4" at 33.404,-190.812 h7.62
  text "3" at 144.224,-190.838 h7.62
  text "2" at 254.663,-190.838 h7.62
  text "7" at -296.593,-191.397 h7.62
ASY_DWG:
  circle w0.38: c190.679,-170.785 r0.829
  lines w0.3: 200.936,-180.333 200.936,-120.333 ; 200.936,-166.333 280.936,-166.333 ; 200.936,-153.333 280.936,-153.333 ; 200.936,-140.333 280.936,-140.333 421.936,-140.333 ; 200.936,-127.333 280.936,-127.333 ; 231.936,291.667 421.936,291.667 ; 232.261,298.759 231.936,298.667 421.936,298.667 ; 232.261,313.759 231.936,313.667 421.936,313.667 ; 245.936,284.667 245.936,313.667 ; 250.936,-180.333 250.936,-120.333 ; 280.936,-180.333 280.936,-120.333 ; 280.936,-174.333 421.936,-174.333 ; 280.936,-158.333 420.936,-158.333 ; 293.936,-174.333 293.936,-158.333 ; 370.936,284.667 370.936,313.667 ; 389.936,-174.333 389.936,-158.333 ; 401.936,284.667 401.936,313.667
  lines w0.38: 175.936,-166.333 177.936,-166.333 ; 175.936,-164.333 177.936,-164.333 ; 175.936,-159.333 177.936,-159.333 ; 175.936,-157.333 177.936,-157.333 ; 176.936,-165.333 176.936,-163.333 ; 176.936,-158.333 176.936,-156.333 ; 181.936,-173.333 183.936,-173.333 ; 181.936,-171.333 183.936,-171.333 ; 182.936,-172.333 182.936,-170.333
  lines w0.508: 201.958,320.871 201.958,333.825 ; 201.958,320.871 201.958,333.825 ; 201.958,320.871 201.958,333.825 ; -368.653,-55.684 -349.349,-55.684 -368.653,-55.684 ; -368.653,-55.227 -349.349,-55.227 -368.653,-55.227 ; -368.653,69.715 -349.349,69.715 -368.653,69.715 ; -368.653,70.173 -349.349,70.173 -368.653,70.173 ; -368.653,195.115 -349.349,195.115 -368.653,195.115 ; -368.653,195.572 -349.349,195.572 -368.653,195.572 ; -239.417,-193.784 -239.417,-180.83 -239.417,-193.784 ; -239.417,320.871 -239.417,333.825 -239.417,320.871 ; -238.96,-193.784 -238.96,-180.83 -238.96,-193.784 ; -238.96,320.871 -238.96,333.825 -238.96,320.871 ; -129.207,-193.784 -129.207,-180.83 -129.207,-193.784 ; -129.207,320.871 -129.207,333.825 -129.207,320.871 ; -128.75,-193.784 -128.75,-180.83 -128.75,-193.784 ; -128.75,320.871 -128.75,333.825 -128.75,320.871 ; -18.971,-193.784 -18.971,-180.83 -18.971,-193.784 ; -18.971,320.871 -18.971,333.825 -18.971,320.871 ; -18.514,-193.784 -18.514,-180.83 -18.514,-193.784 ; -18.514,320.871 -18.514,333.825 -18.514,320.871 ; 91.291,320.871 91.291,333.825 91.291,320.871 ; 91.748,320.871 91.748,333.825 91.748,320.871 ; 201.501,320.871 201.501,333.825 201.501,320.871 ; 311.712,321.125 311.712,333.825 311.712,321.125 ; 311.737,-193.784 311.737,-180.83 311.737,-193.784 ; 312.169,320.871 312.169,333.825 312.169,320.871 ; 312.194,-193.784 312.194,-180.83 312.194,-193.784 ; 422.176,-55.684 441.48,-55.684 422.176,-55.684 ; 422.176,-55.227 441.48,-55.227 422.176,-55.227 ; 422.176,69.741 441.48,69.741 422.176,69.741 ; 422.176,70.198 441.48,70.198 422.176,70.198 ; 422.176,195.166 441.48,195.166 422.176,195.166 ; 422.176,195.623 441.48,195.623 422.176,195.623
  lines w1: -349.064,-180.333 421.936,-180.333 421.936,320.667 -349.064,320.667 -349.064,-180.333
  lines w1.1: 91.936,-193.333 91.936,-180.333 ; 105.936,-180.333 105.936,-140.333 156.936,-140.333 ; 156.936,-180.333 156.936,-140.333 ; 200.936,-193.333 200.936,-180.333 ; 231.936,284.667 231.936,320.667 ; 231.936,305.667 421.936,305.667 ; 280.936,-120.333 156.936,-120.333 156.936,-140.333
  text "1" at 364.772,324.655 h7.62
  text "6" at -186.56,324.477 h7.62
  text "5" at -75.968,324.401 h7.62
  text "7" at -296.491,324.35 h7.62
  text "4" at 33.633,324.249 h7.62
  text "3" at 144.402,324.249 h7.62
  text "2" at 254.435,324.249 h7.62
  text "REVISIONS" at 318.792,315.667 h2.54
  text "REV" at 236.5,308.667 h2.03
  text "DESCRIPTION" at 291.004,308.667 h2.03
  text "DATE" at 382.688,308.667 h2.03
  text "APRVD" at 407.876,308.667 h2.03
  text "NOTES: UNLESS OTHERWISE SPECIFIED" at -336.939,308.567 h2.03
  text "1   RoHS COMPLIANT ASSEMBLY REQUIRED. ASSEMBLE PER IPC-A-610, CLASS 2," at -336.839,302.067 h2.03
  text "01" at 236.904,300.667 h2.54
  text "INITIAL RELEASE" at 247.936,300.667 h2.54
  text "08/11/2016" at 376.776,300.667 h2.54
  text "2   AQUEOUS BASED CLEANING AFTER SOLDER FOR ALL COMPONENTS IS PREFERRED, NO-CLEAN" at -336.745,296.862 h2.03
  text "02" at 236.804,293.867 h2.54
  text "ALPHA 2 RELEASE" at 247.836,293.867 h2.54
  text "09/19/2016" at 376.676,293.867 h2.54
  text "RoHS SOLDER PROCESS IS ACCEPTABLE." at -336.889,292.717 h2.03
  text "3   ITEM IDENTIFICATION: MARK REVISION NUMBER OF THIS DRAWING IN THE SPACE PROVIDED." at -337.064,286.917 h2.03
  text "D" at 426.621,254.983 h7.62
  text "D" at -358.061,254.831 h7.62
  text "C" at 426.621,129.532 h7.62
  text "C" at -358.188,129.329 h7.62
  text "B" at -357.959,3.929 h7.62
  text "B" at 429.698,1.632 h7.62
  text "ASSEMBLY TOP" at 14.62,-80.308 h3.81
  text "A" at 426.494,-121.826 h7.62
  text "A" at -358.213,-121.953 h7.62
  text "APPROVALS" at 218.628,-125.333 h2.03
  text "DATE" at 261.688,-125.333 h2.03
  text "UNLESS OTHERWISE" at 162.68,-127.333 h2.54
  text "DESIGNER" at 201.936,-131.333 h2.03
  text "SPECIFIED" at 169.792,-132.333 h2.54
  text "DIMENSIONS ARE" at 164.712,-137.333 h2.54
  text "F. PRICE" at 205.936,-137.333 h2.54
  text "09/19/2016" at 255.776,-137.333 h2.54
  text "1511 Sixth Ave. Suite 300, Seattle, WA 98101 206.381.0898" at 293.024,-138.333 h2.54
  text "IN MILLIMETERS" at 164.712,-142.333 h2.54
  text "ENGINEER" at 201.936,-144.333 h2.03
  text "PRINTED CIRCUIT BOARD ASSEMBLY" at 305.716,-146.833 h3.81
  text "PROPRIETARY" at 114.172,-147.333 h3.81
  text "D. BRUEY /  M. CIUFFO" at 205.936,-150.333 h2.54
  text "TOLERANCES:" at 168.76,-152.333 h2.54
  text "AND" at 126.364,-153.333 h3.81
  text ".Board_Name" at 328.144,-154.971 h5.08
  text "MECH ENG" at 201.936,-157.333 h2.03
  text ".XX" at 167.44,-159.333 h2.29
  text "0.25" at 180.936,-159.333 h2.29
  text "CONFIDENTIAL" at 112.648,-159.833 h3.81
  text "SIZE" at 285.088,-161.333 h1.78
  text "DWG NO" at 295.936,-161.333 h1.78
  text "REV" at 403.8,-161.333 h1.78
  text "N/A" at 205.936,-163.333 h2.54
  text "THE INFORMATION CONTAINED IN" at 114.662,-164.083 h1.52
  text ".XXX" at 165.608,-166.333 h2.29
  text "0.127" at 180.936,-166.333 h2.29
  text "THIS DRAWING IS PROPRIETARY AND" at 112.838,-166.833 h1.52
  text "RESTRICTED. ANY REPRODUCTION" at 114.662,-169.583 h1.52
  text "600-" at 311.691,-171.034 h7.62
  text ".Board_Number" at 341.391,-171.134 h7.62
  text "D" at 284.888,-171.333 h7.62
  text ".PCB_Revision" at 399.332,-171.841 h7.62
  text "IN PART OR WHOLE WITHOUT THE" at 114.662,-172.333 h1.52
  text "ANGLES" at 167.944,-173.333 h2.29
  text "5" at 186.936,-173.333 h2.29
  text "EXPRESS WRITTEN PERMISSION" at 115.628,-175.083 h1.52
  text "OF THE OWNER IS PROHIBITED" at 115.628,-177.833 h1.52
  text "SCALE:4:1" at 286.528,-178.333 h1.78
  text "SHEET 1 OF 2" at 397.392,-178.333 h1.78
  text "1" at 364.976,-190.381 h7.62
  text "6" at -186.484,-190.533 h7.62
  text "5" at -76.045,-190.533 h7.62
  text "4" at 33.404,-190.812 h7.62
  text "3" at 144.224,-190.838 h7.62
  text "2" at 254.663,-190.838 h7.62
  text "7" at -296.593,-191.397 h7.62
ASY_DWG_R:
  lines w0.3: -349.064,-174.333 -208.064,-174.333 ; -349.064,-140.333 -208.064,-140.333 ; -348.064,-158.333 -208.064,-158.333 ; -317.064,-174.333 -317.064,-158.333 ; -221.064,-174.333 -221.064,-158.333 ; -208.064,-180.333 -208.064,-120.333
  lines w0.508: -129.086,320.871 -129.086,333.825 ; -129.086,320.871 -129.086,333.825 ; -129.086,320.871 -129.086,333.825 ; -368.608,-55.684 -349.304,-55.684 -368.608,-55.684 ; -368.608,-55.227 -349.304,-55.227 -368.608,-55.227 ; -368.608,69.741 -349.304,69.741 -368.608,69.741 ; -368.608,70.198 -349.304,70.198 -368.608,70.198 ; -368.608,195.166 -349.304,195.166 -368.608,195.166 ; -368.608,195.623 -349.304,195.623 -368.608,195.623 ; -239.322,-193.784 -239.322,-180.83 -239.322,-193.784 ; -239.297,320.871 -239.297,333.825 -239.297,320.871 ; -238.865,-193.784 -238.865,-180.83 -238.865,-193.784 ; -238.84,321.125 -238.84,333.825 -238.84,321.125 ; -128.629,320.871 -128.629,333.825 -128.629,320.871 ; -18.876,320.871 -18.876,333.825 -18.876,320.871 ; -18.419,320.871 -18.419,333.825 -18.419,320.871 ; 91.386,-193.784 91.386,-180.83 91.386,-193.784 ; 91.386,320.871 91.386,333.825 91.386,320.871 ; 91.843,-193.784 91.843,-180.83 91.843,-193.784 ; 91.843,320.871 91.843,333.825 91.843,320.871 ; 201.622,-193.784 201.622,-180.83 201.622,-193.784 ; 201.622,320.871 201.622,333.825 201.622,320.871 ; 202.079,-193.784 202.079,-180.83 202.079,-193.784 ; 202.079,320.871 202.079,333.825 202.079,320.871 ; 311.832,-193.784 311.832,-180.83 311.832,-193.784 ; 311.832,320.871 311.832,333.825 311.832,320.871 ; 312.289,-193.784 312.289,-180.83 312.289,-193.784 ; 312.289,320.871 312.289,333.825 312.289,320.871 ; 422.221,-55.684 441.525,-55.684 422.221,-55.684 ; 422.221,-55.227 441.525,-55.227 422.221,-55.227 ; 422.221,69.715 441.525,69.715 422.221,69.715 ; 422.221,70.173 441.525,70.173 422.221,70.173 ; 422.221,195.115 441.525,195.115 422.221,195.115 ; 422.221,195.572 441.525,195.572 422.221,195.572
  lines w1: -349.064,-180.333 421.936,-180.333 421.936,320.667 -349.064,320.667 -349.064,-180.333
  lines w1.1: -128.064,-193.333 -128.064,-180.333 ; -19.064,-193.333 -19.064,-180.333
  text "1" at -291.9,324.655 h7.62
  text "6" at 259.432,324.477 h7.62
  text "5" at 148.84,324.401 h7.62
  text "7" at 369.363,324.35 h7.62
  text "2" at -181.563,324.249 h7.62
  text "3" at -71.53,324.249 h7.62
  text "4" at 39.239,324.249 h7.62
  text "NOTES: UNLESS OTHERWISE SPECIFIED" at 409.811,308.567 h2.03
  text "1   RoHS COMPLIANT ASSEMBLY REQUIRED. ASSEMBLE PER IPC-A-610, CLASS 2," at 409.711,302.067 h2.03
  text "2   AQUEOUS BASED CLEANING AFTER SOLDER FOR ALL COMPONENTS IS PREFERRED, NO-CLEAN" at 409.617,296.862 h2.03
  text "RoHS SOLDER PROCESS IS ACCEPTABLE." at 409.761,292.717 h2.03
  text "3   ITEM IDENTIFICATION: MARK REVISION NUMBER OF THIS DRAWING IN THE SPACE PROVIDED." at 409.936,286.917 h2.03
  text "D" at -353.749,254.983 h7.62
  text "D" at 430.933,254.831 h7.62
  text "C" at -353.749,129.532 h7.62
  text "C" at 431.06,129.329 h7.62
  text "B" at -353.876,3.929 h7.62
  text "B" at 433.781,1.632 h7.62
  text "ASSEMBLY BOTTOM" at 59.62,-80.308 h3.81
  text "A" at -353.622,-121.826 h7.62
  text "A" at 431.085,-121.953 h7.62
  text "1511 Sixth Ave. Suite 300, Seattle, WA 98101 206.381.0898" at -220.152,-138.333 h2.54
  text "PRINTED CIRCUIT BOARD ASSEMBLY" at -232.844,-146.833 h3.81
  text ".Board_Name" at -258.607,-154.848 h5.08
  text "REV" at -330.928,-161.333 h1.78
  text "DWG NO" at -223.064,-161.333 h1.78
  text "SIZE" at -212.216,-161.333 h1.78
  text "600-" at -238.819,-171.034 h7.62
  text ".Board_Number" at -268.519,-171.134 h7.62
  text "D" at -212.016,-171.333 h7.62
  text ".PCB_Revision" at -327.353,-171.854 h7.62
  text "SHEET 2 OF 2" at -324.52,-178.333 h1.78
  text "SCALE:4:1" at -213.656,-178.333 h1.78
  text "1" at -292.104,-190.381 h7.62
  text "5" at 148.917,-190.533 h7.62
  text "6" at 259.356,-190.533 h7.62
  text "4" at 39.468,-190.812 h7.62
  text "2" at -181.791,-190.838 h7.62
  text "3" at -71.352,-190.838 h7.62
  text "7" at 369.465,-191.397 h7.62
TITLEBLOCK:
  lines w0.25: -26.964,-118.833 94.036,-118.833 ; 31.536,-99.833 94.036,-99.833 94.036,-128.333 -26.964,-128.333 -26.964,-106.333 94.036,-106.333 ; 49.536,-128.333 49.536,-99.833 ; 49.536,-111.333 94.036,-111.333 ; 83.036,-118.833 83.036,-111.333
  text "PRODUCT" at 35.78,-102.333 h1.52
  text "1511 SIXTH AVENUE, THIRD FLOOR" at 50.536,-102.333 h1.52
  text "DEVELOPMENT" at 33.848,-105.333 h1.52
  text "SEATTLE,WA 98101  206.381.0898" at 50.536,-105.333 h1.52
  text "DATE" at 50.536,-108.333 h1.02
  text "09/19/2016" at 63.416,-109.833 h2.03
  text "PRINTED CIRCUIT BOARD" at -8.2,-110.833 h2.29
  text "PART NUMBER" at 50.536,-113.333 h1.02
  text "REV" at 87.312,-113.333 h1.02
  text ".Board_Name" at -5.554,-116.784 h3.81
  text "601-" at 56.191,-117.034 h2.54
  text ".Board_Number" at 66.491,-117.034 h2.54
  text ".PCB_Revision" at 86.336,-117.501 h2.54
  text "PROPRIETARY AND CONFIDENTIAL" at 54.762,-121.833 h1.52
  text "THE INFORMATION CONTAINED IN THIS DRAWING IS PROPRIETARY AND" at 53.546,-123.833 h0.76
  text "RESTRICTED. ANY REPRODUCTION IN PART OR WHOLE WITHOUT THE" at 54.458,-125.333 h0.76
  text "EXPRESS WRITTEN PERMISSION OF THE OWNER IS PROHIBITED" at 55.174,-126.833 h0.76
DXF_JULY25_TOP:
  drawing of 218 lines, arcs and shapes, not listed
  text "6." at -59.521,150.569 h2.12
  text "LEAD PROTRUSION NOT TO EXCEED 0.03" at -52.854,150.569 h2.12
  text "7." at -59.521,147.747 h2.12
  text "PRIMARY" at -20.128,74.073 h2.12
  text "SECONDARY" at 58.37,74.073 h2.12
  text "14" at 20.25,5.05 h1.52
  text "16" at 25.25,5.05 h1.52
  text "18" at 29.25,5.05 h1.52
  text "20" at 34.25,5.05 h1.52
  text "22" at 39.25,5.05 h1.52
  text "24" at 44.25,5.05 h1.52
  text "26" at 48.25,5.05 h1.52
  text "28" at 53.25,5.05 h1.52
  text "8" at 6.725,5 h1.52
  text "10" at 10.925,4.975 h1.52
  text "12" at 15.7,4.95 h1.52
  text "6" at 2.125,4.9 h1.52
  text "1" at 18.125,-5.4 h1.52
  text "30" at 48.25,-8 h1.52
  text "32" at 53,-8 h1.52
  text "2" at 2.125,-8.1 h1.52
  text "4" at 7.125,-8.1 h1.52
DXF_JULY25_BOT:
  circle w0.013: c0,0 r1.15
  circle w0.013: c57,0 r1.15
  lines w0.013: -3.5,-9.5 -3.5,8 60.5,8 60.5,-9.5 -3.5,-9.5 ; 0.8,-9 0.8,-5.4 4.5,-5.4 4.5,-9 0.8,-9 ; 0.8,3.9 4.5,3.9 4.5,7.5 0.8,7.5 0.8,3.9 ; 5.5,-9 5.5,-5.4 9.2,-5.4 9.2,-9 5.5,-9 ; 5.5,3.9 9.2,3.9 9.2,7.5 5.5,7.5 5.5,3.9 ; 10.2,3.9 10.2,7.5 13.9,7.5 13.9,3.9 10.2,3.9 ; 14.9,3.9 14.9,7.5 18.6,7.5 18.6,3.9 14.9,3.9 ; 19.6,3.9 23.3,3.9 23.3,7.5 19.6,7.5 19.6,3.9 ; 24.3,3.9 24.3,7.5 28,7.5 28,3.9 24.3,3.9 ; 29,3.9 29,7.5 32.7,7.5 32.7,3.9 29,3.9 ; 33.7,3.9 37.4,3.9 37.4,7.5 33.7,7.5 33.7,3.9 ; 38.4,3.9 42.1,3.9 42.1,7.5 38.4,7.5 38.4,3.9 ; 43.1,3.9 43.1,7.5 46.8,7.5 46.8,3.9 43.1,3.9 ; 47.8,-9 51.5,-9 51.5,-5.4 47.8,-5.4 47.8,-9 ; 47.8,3.9 51.5,3.9 51.5,7.5 47.8,7.5 47.8,3.9 ; 52.5,-9 56.2,-9 56.2,-5.4 52.5,-5.4 52.5,-9 ; 52.5,3.9 52.5,7.5 56.2,7.5 56.2,3.9 52.5,3.9
Drill Drawing:
  lines w0.254: -65.001,129.336 -63.307,129.336 -63.307,131.03 -65.001,131.03 -65.001,129.336
  lines w0.381: -66.519,128.193 144.649,128.193 ; -66.519,135.813 144.649,135.813 ; -52.527,124.383 -52.527,139.623 ; -34.803,124.383 -34.803,139.623 ; -0.624,124.383 -0.624,139.623 ; 21.366,124.383 21.366,139.623 ; 34.215,124.383 34.215,139.623 ; 52.854,124.383 52.854,139.623 ; 90.942,124.383 90.942,139.623 ; 105.925,124.383 105.925,139.623 ; 124.868,124.383 124.868,139.623 ; -66.519,124.383 144.649,124.383 144.649,139.623 -66.519,139.623 -66.519,124.383
  text "Symbol" at -64.233,136.956 h1.83
  text "Hit Count" at -51.384,136.956 h1.83
  text "Finished Hole Size" at -33.66,136.956 h1.83
  text "Hole Length" at 0.519,136.956 h1.83
  text "Plated" at 22.509,136.956 h1.83
  text "Hole Type" at 35.358,136.956 h1.83
  text "Drill Layer Pair" at 53.997,136.956 h1.83
  text "Via/Pad" at 92.085,136.956 h1.83
  text "Pad Shape" at 107.068,136.956 h1.83
  text "Tolerance" at 126.011,136.956 h1.83
  text "178" at -51.384,133.146 h1.52
  text "0.250mm (9.84mil)" at -33.66,133.146 h1.52
  text "-" at 0.519,133.146 h1.52
  text "PTH" at 22.509,133.146 h1.52
  text "Round" at 35.358,133.146 h1.52
  text "Top Layer - Bottom Layer" at 53.997,133.146 h1.52
  text "Via" at 92.085,133.146 h1.52
  text "Rounded" at 107.068,133.146 h1.52
  text "E" at -64.972,132.893 h1.69
  text "2" at -51.384,129.336 h1.52
  text "2.150mm (84.65mil)" at -33.66,129.336 h1.52
  text "-" at 0.519,129.336 h1.52
  text "PTH" at 22.509,129.336 h1.52
  text "Round" at 35.358,129.336 h1.52
  text "Top Layer - Bottom Layer" at 53.997,129.336 h1.52
  text "Pad" at 92.085,129.336 h1.52
  text "Rounded" at 107.068,129.336 h1.52
  text "180 Total" at -51.384,125.526 h1.52
  text ".Layer_Name" at -2.078,-125.179 h3.5
Mechanical 28:
  drawing of 786 lines, arcs and shapes, not listed

## Text inside footprints (layer, text, board x,y; h text height)
J5: 3D_TOP "1" at 18.888,-5.299 h1.02 r180; 3D_TOP "2" at 18.915,1.035 h1.02 r180; 3D_TOP "100" at 39.481,1.089 h1.02 r180; 3D_TOP "99" at 39.173,-5.28 h1.02 r180; Top Overlay "99" at 40.25,-4.364 h0.7; Top Overlay "100" at 41,-3.1 h0.7 r90; Top Overlay "2" at 16.34,-1.79 h0.7; Top Overlay "1" at 16.64,-4.19 h0.7
M1: Mechanical 18 "1" at -1.771,0.011 h0.64
M2: Mechanical 18 "1" at 55.229,0.011 h0.64